# EAGLE board VF_FabricaDeUnicorniosMuertos_PANEL (EAGLE 9.5.1)
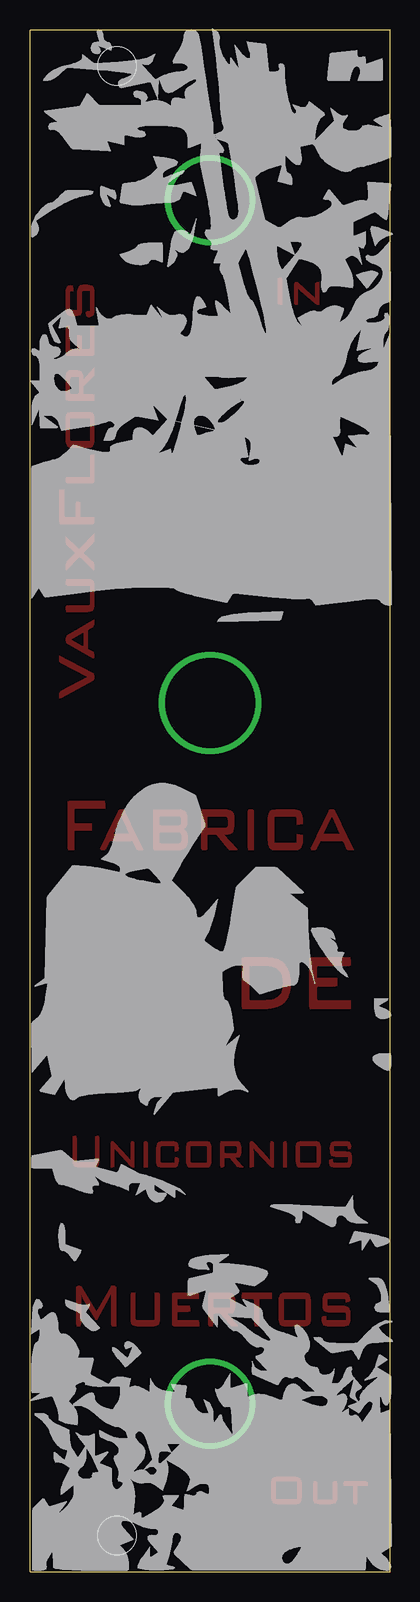
[diagram p0: board, top side]

Size 30 x 128.5 mm. Coordinates in mm from the lower left corner, seen from the top.
Copper layers (1*16): Top 0.035mm / dielectric 1.5mm / Bottom 0.035mm
Design rules "default": minimum track width 6mil, minimum drill 0.35mm, track to track 6mil, track to pad 6mil, pad to pad 6mil, via to via 6mil, smd to smd 6mil, copper to edge 40mil, drill to drill 6mil, minimum pad ring 10mil, minimum via ring 8mil, stop-mask expansion 4mil, vias tented up to drill 0mil, thermal gap 10mil
Net classes: 1 power: width 0.61 mm

## Footprints (pad centres in the part's own frame; a part is rotated, then mirrored left to right if it is on the bottom)
EURO_PANEL_6HP = hole 3.2: 7.5,125.5; 7.5,3

## Placement (x,y rotation side)
U$2  [EURO_PANEL_6HP]  -0.24,0 0 top

## Library data of the parts
U$2 = eurohelper

## Tracks (layer width: path | path; a pad name or v marks a point on that pad's centre or on a via)
GND
  pour Top (rank 3): 21.03,105.64 21.03,107.68 20.97,107.83 20.77,107.83 20.67,107.73 20.67,105.69 20.83,105.64
  pour Top (rank 3): 24.08,105.64 24.08,107.44 23.88,107.44 23.77,107.35 23.77,106.35 23.78,106.15 23.76,106.07 23.63,106.22 23.48,106.36 22.29,107.42 22.1,107.44 22.01,107.33 22.01,105.73 22.12,105.64 22.32,105.64 22.32,105.84 22.32,106.64 22.32,106.84 22.3,107.04 22.53,106.81 23.73,105.75 23.88,105.64
  pour Top (rank 3): 22.64,6.37 22.64,7.37 22.62,7.57 22.53,7.74 22.36,7.82 22.26,7.54 22.28,7.37 22.28,5.97 22.28,5.97 20.48,5.97 20.47,6.15 20.47,7.55 20.67,7.55 22.25,7.55 22.34,7.83 22.15,7.85 20.76,7.85 20.56,7.85 20.36,7.82 20.19,7.71 20.12,7.53 20.11,7.33 20.11,6.14 20.13,5.94 20.22,5.76 20.4,5.68 20.6,5.66 21.99,5.66 22.19,5.66 22.39,5.69 22.56,5.8 22.62,5.98 22.64,6.18
  pour Top (rank 3): 25.59,6.09 25.59,7.28 25.57,7.46 25.37,7.46 25.25,7.38 25.25,5.99 25.1,5.93 24.11,5.93 23.94,5.96 23.94,7.35 23.84,7.46 23.64,7.46 23.6,7.31 23.6,6.11 23.61,5.91 23.7,5.74 23.89,5.67 24.08,5.66 25.08,5.66 25.28,5.67 25.47,5.73 25.57,5.89
  pour Top (rank 3): 28.14,7.19 28.14,7.39 28,7.46 26.19,7.46 26.1,7.34 26.16,7.19 26.76,7.19 26.95,7.18 26.95,5.77 27.05,5.66 27.25,5.66 27.29,5.82 27.29,7.03 27.33,7.19
  pour Top (rank 3): 2.45,76.29 2.45,75.89 2.56,75.76 4.72,74.66 4.86,74.57 2.55,73.35 2.45,73.21 2.45,72.8 2.6,72.85 5.25,74.3 5.37,74.43 5.37,74.63 5.31,74.8
  pour Top (rank 3): 5.29,79.28 3.06,77.96 2.97,77.81 2.97,77.63 3.34,77.7 4.37,78.28 4.46,78.33 4.46,77.14 4.36,77.12 3.49,77.6 3.34,77.69 2.98,77.6 3.04,77.46 5.28,76.16 5.37,76.21 5.37,76.41 5.33,76.58 4.98,76.77 4.81,76.87 4.81,78.46 4.93,78.59 5.27,78.78 5.37,78.93 5.37,79.32
  pour Top (rank 3): 4.8,82.7 3,82.7 2.97,82.53 2.97,82.33 3.09,82.24 4.89,82.24 5,82.16 5,80.56 4.87,80.49 3.07,80.49 2.97,80.39 2.97,80.19 3.02,80.04 4.82,80.04 5.02,80.06 5.2,80.12 5.32,80.28 5.36,80.48 5.37,80.68 5.37,82.08 5.36,82.28 5.31,82.47 5.19,82.62 5,82.68
  pour Top (rank 3): 5.37,86.49 4.12,85.18 3.97,85.26 2.97,86.25 2.97,85.85 3,85.66 3.75,84.98 3.79,84.85 3.08,84.14 2.97,83.98 2.97,83.58 3.01,83.46 4.12,84.62 4.26,84.52 5.27,83.54 5.37,83.51 5.37,83.91 5.3,84.08 4.4,84.89 4.53,85.03 5.24,85.74 5.37,85.89
  pour Top (rank 3): 2.85,90.13 2.65,90.13 2.45,90.13 2.45,87.54 2.48,87.36 5.28,87.36 5.37,87.47 5.37,87.67 5.34,87.85 4.34,87.85 4.19,87.9 4.19,89.09 4.05,89.15 3.85,89.15 3.8,89 3.8,88 3.76,87.85 2.96,87.85 2.85,87.94
  pour Top (rank 3): 5.37,93.07 5.17,93.07 5,93.03 5,91.23 4.82,91.21 3.02,91.21 2.97,91.05 2.97,90.85 3.07,90.75 5.28,90.75 5.37,90.86
  pour Top (rank 3): 4.75,96.62 3.56,96.62 3.36,96.61 3.17,96.55 3.03,96.41 2.98,96.21 2.97,96.01 2.97,94.41 2.97,94.22 3,94.02 3.09,93.84 3.27,93.75 3.46,93.72 3.66,93.72 4.86,93.72 5.06,93.74 5.24,93.83 5.33,94 5.36,94.2 5.37,94.4 5.37,96 5.36,96.19 5,96.16 5,94.17 3.4,94.17 3.33,94.29 3.33,96.09 3.45,96.17 4.85,96.17 4.99,96.17 5.35,96.21 5.31,96.39 5.19,96.54 5,96.61 4.8,96.62
  pour Top (rank 3): 5.26,100.21 4.47,99.32 4.43,99.41 4.1,99.4 4.1,98.21 3.99,98.12 3.39,98.12 3.32,98.25 3.32,99.24 3.33,99.44 3.42,99.61 3.61,99.65 3.81,99.65 3.85,99.65 4.04,99.6 4.09,99.42 4.43,99.43 4.42,99.62 4.4,99.82 4.31,99.99 4.13,100.08 3.93,100.09 3.53,100.09 3.33,100.09 3.15,100.02 3.02,99.87 2.98,99.67 2.97,99.47 2.97,97.68 3.16,97.67 5.36,97.67 5.37,97.86 5.37,98.06 5.23,98.12 4.43,98.12 4.43,98.72 4.53,98.88 5.23,99.59 5.37,99.73 5.37,100.33
  pour Top (rank 3): 5.37,103.83 5.17,103.83 5.02,103.78 5.02,101.99 4.96,101.84 4.36,101.84 4.3,101.98 4.3,102.98 4.15,103.02 3.95,103.02 3.94,102.83 3.94,102.03 3.93,101.84 3.33,101.84 3.33,102.04 3.33,103.63 3.3,103.8 3.1,103.8 2.97,103.73 2.97,101.54 3.02,101.39 5.21,101.39 5.37,101.44
  pour Top (rank 3): 4.8,107.22 4.6,107.22 4.4,107.21 4.21,107.18 4.05,107.07 3.97,106.89 3.95,106.69 3.95,105.29 3.94,105.1 3.35,105.1 3.33,105.28 3.33,106.68 3.43,106.78 3.62,106.78 3.61,106.95 3.56,107.15 3.4,107.18 3.2,107.14 3.05,107.01 2.99,106.82 2.97,106.63 2.97,105.23 2.99,105.04 3.06,104.85 3.22,104.73 3.41,104.69 3.61,104.69 3.81,104.7 4.01,104.72 4.19,104.79 4.29,104.96 4.33,105.15 4.33,105.35 4.33,106.75 4.47,106.81 4.86,106.81 5,106.75 5,105.16 4.96,105.01 4.76,105.01 4.67,104.92 4.71,104.72 4.8,104.59 5,104.61 5.19,104.67 5.31,104.82 5.36,105.01 5.37,105.21 5.37,106.6 5.36,106.8 5.31,106.99 5.19,107.14 5,107.2
  pour Top (rank 3): 6.27,63.64 6.27,64.04 6.22,64.18 3.28,64.18 3.15,64.13 3.15,60.33 3.19,60.18 3.68,60.18 3.7,60.36 3.7,61.76 3.84,61.79 5.15,61.79 5.17,61.97 5.17,62.17 5.13,62.33 3.82,62.33 3.7,62.38 3.7,63.58 3.81,63.64
  pour Top (rank 3): 9.41,60.25 7.91,63.34 7.64,62.92 8.28,61.53 8.33,61.42 7.01,61.42 6.92,61.47 7.56,62.88 7.63,62.92 7.9,63.36 7.8,63.47 7.47,63.47 7.34,63.38 5.87,60.26 5.92,60.18 6.25,60.18 6.37,60.26 6.61,60.79 6.7,60.95 8.5,60.95 8.6,60.82 8.84,60.29 8.95,60.18 9.44,60.18
  pour Top (rank 3): 13.14,60.94 13.14,61.14 13.13,61.34 13.09,61.54 13,61.7 12.87,61.81 12.73,61.86 12.47,61.63 12.59,61.52 12.63,61.32 12.63,61.12 12.63,61.03 12.61,60.84 12.5,60.69 12.34,60.66 10.87,60.66 10.76,60.74 10.76,61.54 10.82,61.66 12.3,61.66 12.45,61.64 12.72,61.87 12.48,62.16 12.33,62.14 10.86,62.14 10.76,62.23 10.76,62.83 10.8,62.99 12.27,62.99 12.43,62.98 12.57,62.88 12.61,62.69 12.61,62.49 12.6,62.3 12.5,62.17 12.72,61.88 12.75,61.9 12.9,61.96 13.03,62.09 13.1,62.27 13.12,62.47 13.12,62.87 13.09,63.06 13.02,63.24 12.9,63.37 12.75,63.44 12.58,63.47 12.42,63.47 10.29,63.47 10.25,63.31 10.25,60.31 10.31,60.18 12.28,60.18 12.44,60.18 12.61,60.2 12.77,60.24 12.92,60.32 13.04,60.45 13.12,60.63 13.14,60.82
  pour Top (rank 3): 17.21,60.25 16.11,61.44 16.2,61.46 16.18,61.93 14.89,61.93 14.78,62 14.78,62.79 14.79,62.99 16.09,62.99 16.26,62.99 16.41,62.93 16.49,62.76 16.5,62.56 16.5,62.36 16.5,62.26 16.48,62.06 16.36,61.94 16.21,61.93 16.22,61.47 16.38,61.47 16.54,61.48 16.7,61.5 16.85,61.59 16.95,61.75 16.99,61.94 17,62.14 17,62.74 17,62.94 16.96,63.13 16.87,63.3 16.74,63.41 16.58,63.46 16.42,63.47 14.29,63.47 14.27,63.29 14.27,60.3 14.34,60.18 14.67,60.18 14.78,60.24 14.78,61.44 14.92,61.47 15.41,61.47 15.56,61.42 16.49,60.3 16.62,60.18 17.27,60.18
  pour Top (rank 3): 18.66,60.18 18.66,63.38 18.56,63.46 18.24,63.46 18.16,63.36 18.16,60.36 18.17,60.18
  pour Top (rank 3): 22.72,60.96 22.72,61.16 22.71,61.35 22.23,61.46 22.22,61.28 22.22,60.68 20.41,60.68 20.34,60.79 20.34,62.79 20.34,62.98 22.15,62.98 22.22,62.86 22.22,62.46 22.23,62.28 22.71,62.37 22.72,62.56 22.72,62.76 22.7,62.96 22.67,63.16 22.57,63.32 22.42,63.41 22.26,63.45 22.1,63.47 20.46,63.47 20.3,63.46 20.14,63.42 19.99,63.33 19.89,63.18 19.85,62.98 19.83,62.78 19.83,62.58 19.83,60.98 19.83,60.78 19.86,60.58 19.92,60.4 20.04,60.27 20.2,60.21 20.36,60.18 20.53,60.18 22,60.18 22.17,60.18 22.33,60.2 22.49,60.26 22.62,60.38 22.69,60.56 22.72,60.76
  pour Top (rank 3): 26.94,60.25 25.44,63.35 25.33,63.47 25,63.47 24.88,63.38 23.4,60.26 23.45,60.18 23.78,60.18 23.9,60.26 24.14,60.79 24.23,60.95 26.02,60.95 25.84,61.42 24.54,61.42 24.45,61.47 25.09,62.88 25.17,62.93 25.81,61.53 25.85,61.43 26.04,60.94 26.13,60.82 26.37,60.29 26.48,60.18 26.97,60.18
  pour Top (rank 3): 21.73,49.11 21.72,49.31 21.7,49.5 21.67,49.7 21.62,49.89 21.55,50.07 21.47,50.25 21.37,50.41 21.26,50.55 21.14,50.68 21,50.8 20.86,50.9 20.71,50.97 20.55,51.02 20.39,51.07 20.23,51.1 20.07,51.12 19.9,51.13 19.74,51.14 19.59,51.14 19.56,50.52 19.71,50.51 19.87,50.5 20.04,50.48 20.2,50.45 20.36,50.4 20.51,50.33 20.65,50.24 20.78,50.11 20.89,49.96 20.97,49.79 21.03,49.6 21.06,49.41 21.08,49.21 21.08,49.06 21.08,48.86 21.06,48.67 21.02,48.47 20.96,48.29 20.88,48.11 20.77,47.96 20.64,47.84 20.49,47.75 20.34,47.69 20.18,47.64 20.02,47.61 19.86,47.6 19.69,47.59 19.53,47.58 18.38,47.58 18.29,47.66 18.29,50.46 18.4,50.52 19.53,50.52 19.57,51.14 17.78,51.14 17.64,51.11 17.64,47.11 17.67,46.95 19.63,46.95 19.79,46.95 19.96,46.97 20.12,46.98 20.28,47.01 20.44,47.05 20.6,47.1 20.75,47.17 20.9,47.25 21.05,47.34 21.18,47.46 21.3,47.59 21.41,47.74 21.5,47.9 21.58,48.08 21.64,48.27 21.68,48.46 21.71,48.66 21.73,48.85 21.73,49.05
  pour Top (rank 3): 26.75,46.95 26.75,47.55 26.59,47.56 23.96,47.56 23.91,47.69 23.91,48.7 23.97,48.82 25.45,48.82 25.6,48.84 25.6,49.44 23.96,49.44 23.91,49.58 23.91,50.38 23.96,50.52 26.59,50.52 26.71,50.57 26.71,50.97 26.69,51.14 23.41,51.14 23.26,51.12 23.26,47.1 23.3,46.95
  pour Top (rank 3): 5.77,34.32 5.77,36.14 5.71,36.27 5.55,36.27 5.42,36.22 5.42,34.2 5.36,34.08 4.04,34.08 3.9,34.1 3.9,36.12 3.86,36.27 3.7,36.27 3.56,36.24 3.56,34.43 3.56,34.23 3.58,34.03 3.65,33.85 3.8,33.75 3.96,33.72 4.12,33.72 5.28,33.72 5.44,33.73 5.6,33.79 5.71,33.93 5.76,34.12
  pour Top (rank 3): 8.69,33.72 8.69,35.71 8.61,35.81 8.45,35.81 8.39,35.69 8.39,34.49 8.4,34.29 8.39,34.21 8.28,34.36 8.16,34.5 7.07,35.69 6.94,35.81 6.78,35.81 6.71,35.7 6.71,33.91 6.71,33.72 6.88,33.72 7.01,33.76 7.01,34.96 7,35.15 6.99,35.35 7.06,35.27 7.17,35.13 8.39,33.8 8.53,33.72
  pour Top (rank 3): 9.79,33.72 9.79,35.71 9.72,35.81 9.55,35.81 9.47,35.71 9.47,33.72 9.63,33.72
  pour Top (rank 3): 12.38,34.21 12.38,34.41 12.26,34.49 12.1,34.53 12.06,34.39 12.06,34.19 12.02,34.04 10.88,34.04 10.86,34.21 10.86,35.41 10.94,35.5 11.92,35.5 12.06,35.47 12.06,35.08 12.2,35.08 12.36,35.11 12.38,35.29 12.36,35.49 12.31,35.68 12.18,35.78 12.02,35.81 11.85,35.81 11.04,35.81 10.88,35.81 10.72,35.78 10.59,35.66 10.54,35.47 10.54,35.27 10.54,34.28 10.54,34.08 10.58,33.89 10.7,33.76 10.86,33.72 11.02,33.72 12,33.72 12.16,33.75 12.3,33.84 12.37,34.02
  pour Top (rank 3): 15.1,34.4 15.1,35.2 15.1,35.41 15.07,35.6 14.96,35.75 14.81,35.81 14.64,35.81 13.49,35.81 13.33,35.81 13.17,35.76 13.07,35.63 13.36,35.5 13.5,35.5 14.65,35.5 14.78,35.45 14.78,34.05 14.78,34.04 13.46,34.04 13.35,34.09 13.35,35.48 13.06,35.61 13.03,35.42 13.02,35.22 13.02,34.22 13.03,34.02 13.1,33.84 13.24,33.75 13.4,33.72 14.71,33.72 14.88,33.74 15.02,33.83 15.09,34.02 15.1,34.21
  pour Top (rank 3): 17.67,33.82 17.05,34.49 17.1,34.54 17.26,34.55 17.43,34.58 17.55,34.71 17.59,34.9 17.59,35.31 17.58,35.51 17.52,35.69 17.38,35.79 17.21,35.81 15.9,35.81 15.85,35.67 15.85,33.86 15.9,33.72 16.07,33.72 16.17,33.79 16.17,34.4 16.21,34.53 16.23,34.84 16.17,34.96 16.17,35.36 16.22,35.51 17.04,35.51 17.2,35.47 17.27,35.3 17.27,35.1 17.27,35.04 17.22,34.86 17.05,34.83 16.24,34.83 16.23,34.54 16.55,34.54 16.69,34.48 17.28,33.77 17.43,33.72 17.76,33.72
  pour Top (rank 3): 20.31,33.72 20.31,35.71 20.23,35.81 20.07,35.81 20.01,35.69 20.01,34.49 20.02,34.29 20.01,34.21 19.9,34.36 19.78,34.5 18.69,35.69 18.56,35.81 18.4,35.81 18.33,35.7 18.33,33.91 18.33,33.72 18.5,33.72 18.63,33.76 18.63,34.96 18.62,35.15 18.61,35.35 18.68,35.27 18.79,35.13 20.01,33.8 20.14,33.72
  pour Top (rank 3): 21.41,33.72 21.41,35.71 21.33,35.81 21.17,35.81 21.09,35.71 21.09,33.72 21.25,33.72
  pour Top (rank 3): 24.23,34.4 24.23,35.2 24.23,35.41 24.2,35.6 24.1,35.75 23.94,35.81 23.78,35.81 22.63,35.81 22.46,35.81 22.3,35.76 22.2,35.63 22.49,35.5 22.64,35.5 23.79,35.5 23.91,35.45 23.91,34.05 23.91,34.04 22.6,34.04 22.48,34.09 22.48,35.48 22.19,35.61 22.16,35.42 22.15,35.22 22.15,34.22 22.17,34.02 22.23,33.84 22.37,33.75 22.53,33.72 23.85,33.72 24.01,33.74 24.15,33.83 24.22,34.02 24.23,34.21
  pour Top (rank 3): 26.81,34.21 26.81,34.41 26.8,34.61 26.75,34.8 26.63,34.92 26.47,34.96 26.3,34.96 25.32,34.96 25.29,35.13 25.29,35.33 25.31,35.5 26.46,35.5 26.49,35.35 26.56,35.24 26.72,35.29 26.78,35.42 26.75,35.61 26.64,35.76 26.48,35.81 26.32,35.81 25.5,35.81 25.34,35.81 25.18,35.78 25.05,35.66 25,35.47 25,35.27 25,35.07 25.02,34.87 25.11,34.71 25.26,34.64 25.42,34.62 26.41,34.62 26.52,34.56 26.52,34.16 26.45,34.04 25.31,34.04 25.22,34.13 25.22,34.33 25.07,34.31 24.93,34.26 24.94,34.06 24.99,33.87 25.12,33.75 25.28,33.72 25.44,33.72 26.42,33.72 26.59,33.74 26.73,33.83 26.79,34.02
  pour Top (rank 3): 7.17,20.49 7.17,23.68 7.08,23.77 6.91,23.77 6.75,23.76 5.63,21.79 5.54,21.64 4.27,23.72 4.13,23.77 3.97,23.77 3.87,23.68 3.87,20.69 3.88,20.49 4.2,20.49 4.25,20.63 4.25,22.82 4.24,23.15 4.31,22.97 4.4,22.8 5.46,21.03 5.61,21.03 6.62,22.84 6.71,23.01 6.78,23.18 6.76,22.78 6.76,22.58 6.76,20.59 6.84,20.49
  pour Top (rank 3): 10.82,21.13 10.82,23.12 10.72,23.18 10.55,23.18 10.4,23.17 10.4,20.98 10.31,20.9 8.84,20.9 8.79,21.04 8.79,23.03 8.76,23.18 8.43,23.18 8.38,23.05 8.38,21.06 8.39,20.87 8.45,20.68 8.57,20.56 8.73,20.51 8.89,20.49 10.2,20.49 10.36,20.49 10.52,20.52 10.67,20.58 10.77,20.74 10.81,20.93
  pour Top (rank 3): 14.09,20.49 14.09,20.69 14.08,20.89 12.29,20.89 12.26,21.05 12.26,21.65 12.39,21.69 13.2,21.69 13.35,21.71 13.35,21.91 13.33,22.09 12.35,22.09 12.26,22.18 12.26,22.78 12.42,22.78 14.05,22.78 14.07,22.96 14.07,23.16 13.92,23.18 11.97,23.18 11.85,23.13 11.85,20.54 11.97,20.49
  pour Top (rank 3): 17.3,20.51 16.44,21.44 16.37,21.55 16.54,21.55 16.7,21.56 16.86,21.58 17,21.69 17.08,21.86 17.09,22.06 17.09,22.66 17.07,22.86 16.99,23.04 16.86,23.14 16.7,23.18 16.53,23.18 14.89,23.18 14.86,23.02 14.86,20.62 14.92,20.49 15.25,20.49 15.28,20.66 15.28,21.46 15.36,21.54 15.35,21.93 15.28,22.02 15.28,22.62 15.3,22.79 16.45,22.79 16.61,22.74 16.68,22.57 16.68,22.37 16.68,22.19 16.65,22 16.51,21.92 16.34,21.92 15.37,21.92 15.38,21.55 15.86,21.55 15.98,21.42 16.69,20.58 16.82,20.49 17.31,20.49
  pour Top (rank 3): 20.15,22.78 20.15,22.99 20.15,23.18 17.67,23.18 17.65,23.01 17.65,22.81 17.8,22.78 18.62,22.78 18.69,22.67 18.69,20.65 18.73,20.49 19.06,20.49 19.11,20.63 19.11,22.65 19.16,22.78
  pour Top (rank 3): 23.4,21.23 23.4,22.43 23.39,22.63 23.37,22.83 23.31,23.01 23.18,23.13 23.04,23.17 22.98,22.77 22.98,22.59 22.98,20.99 22.98,20.9 21.19,20.9 21.14,21.04 21.14,22.64 21.18,22.78 22.97,22.78 23.01,23.17 22.86,23.18 21.23,23.18 21.07,23.17 20.91,23.11 20.79,22.98 20.74,22.79 20.73,22.59 20.72,21.2 20.73,21 20.76,20.8 20.83,20.63 20.97,20.53 21.13,20.5 21.3,20.49 22.77,20.49 22.93,20.49 23.09,20.52 23.24,20.58 23.35,20.74 23.39,20.93 23.4,21.13
  pour Top (rank 3): 26.71,21.13 26.71,21.53 26.69,21.73 26.62,21.91 26.49,22.03 26.34,22.07 26.17,22.09 24.86,22.09 24.76,22.16 24.76,22.76 24.91,22.78 26.22,22.78 26.3,22.69 26.3,22.49 26.41,22.46 26.57,22.5 26.68,22.6 26.66,22.8 26.61,22.98 26.49,23.11 26.33,23.17 26.17,23.18 25.02,23.18 24.86,23.18 24.69,23.16 24.54,23.09 24.43,22.94 24.39,22.75 24.38,22.55 24.38,22.35 24.39,22.15 24.41,21.95 24.5,21.78 24.64,21.69 24.8,21.66 24.97,21.65 26.28,21.65 26.33,21.52 26.33,20.92 26.19,20.9 24.71,20.9 24.67,21.05 24.67,21.25 24.55,21.27 24.39,21.23 24.29,21.13 24.31,20.93 24.34,20.73 24.45,20.58 24.6,20.52 24.76,20.49 24.93,20.49 26.07,20.49 26.24,20.49 26.4,20.52 26.55,20.58 26.66,20.73 26.7,20.93
N$7  (via drill 6.5)
  other vias: 15,114.3
N$8  (via drill 6.5)
  other vias: 15,13.97
N$9  (via drill 7.5)
  other vias: 15,72.39